# Altium PCB IncubatorPCB.PcbDoc
Units mm, origin at the board's own origin, x right, y up, seen from the top; angles counter-clockwise.
Board outline 90 x 70 mm, 2 copper layers (Top Layer, Bottom Layer); 36 components, 30 nets, 133 pads, 0 vias.
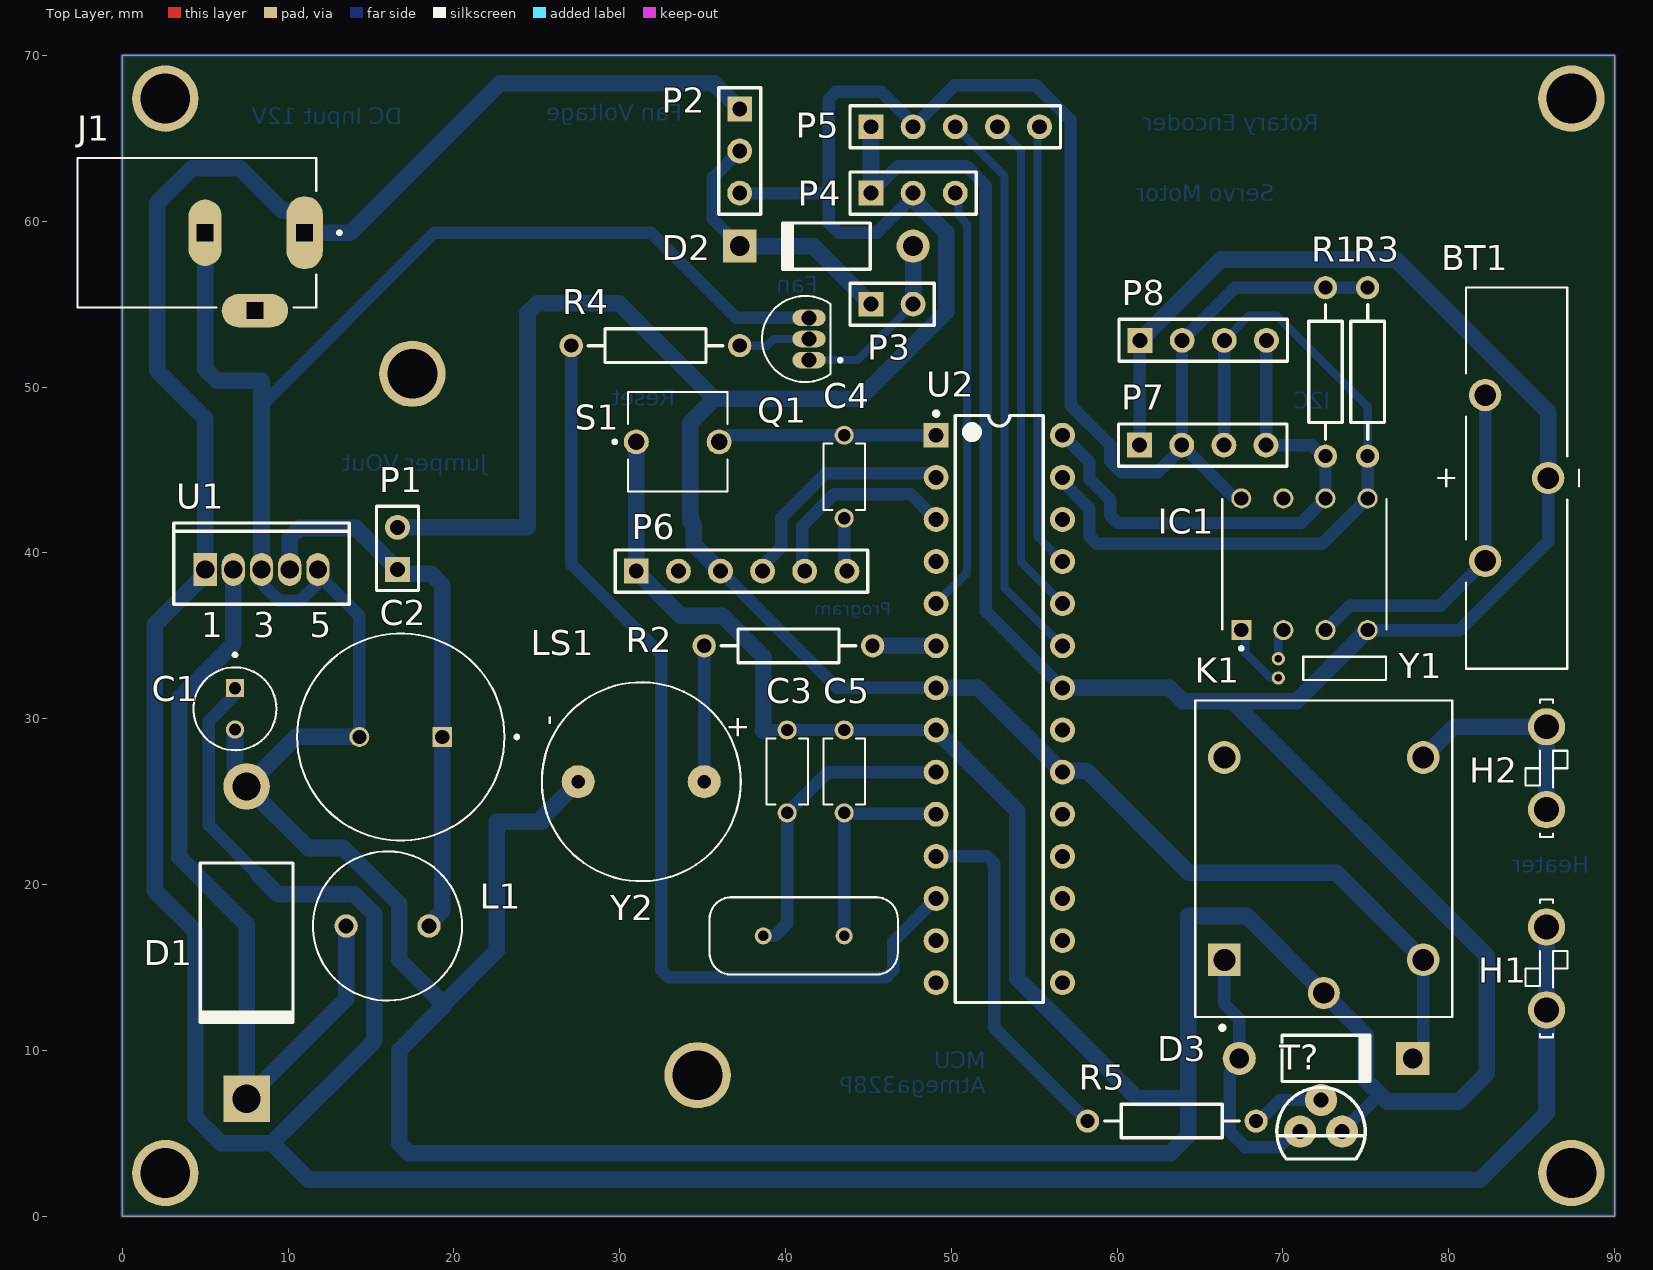
[diagram p0: Top Layer view]
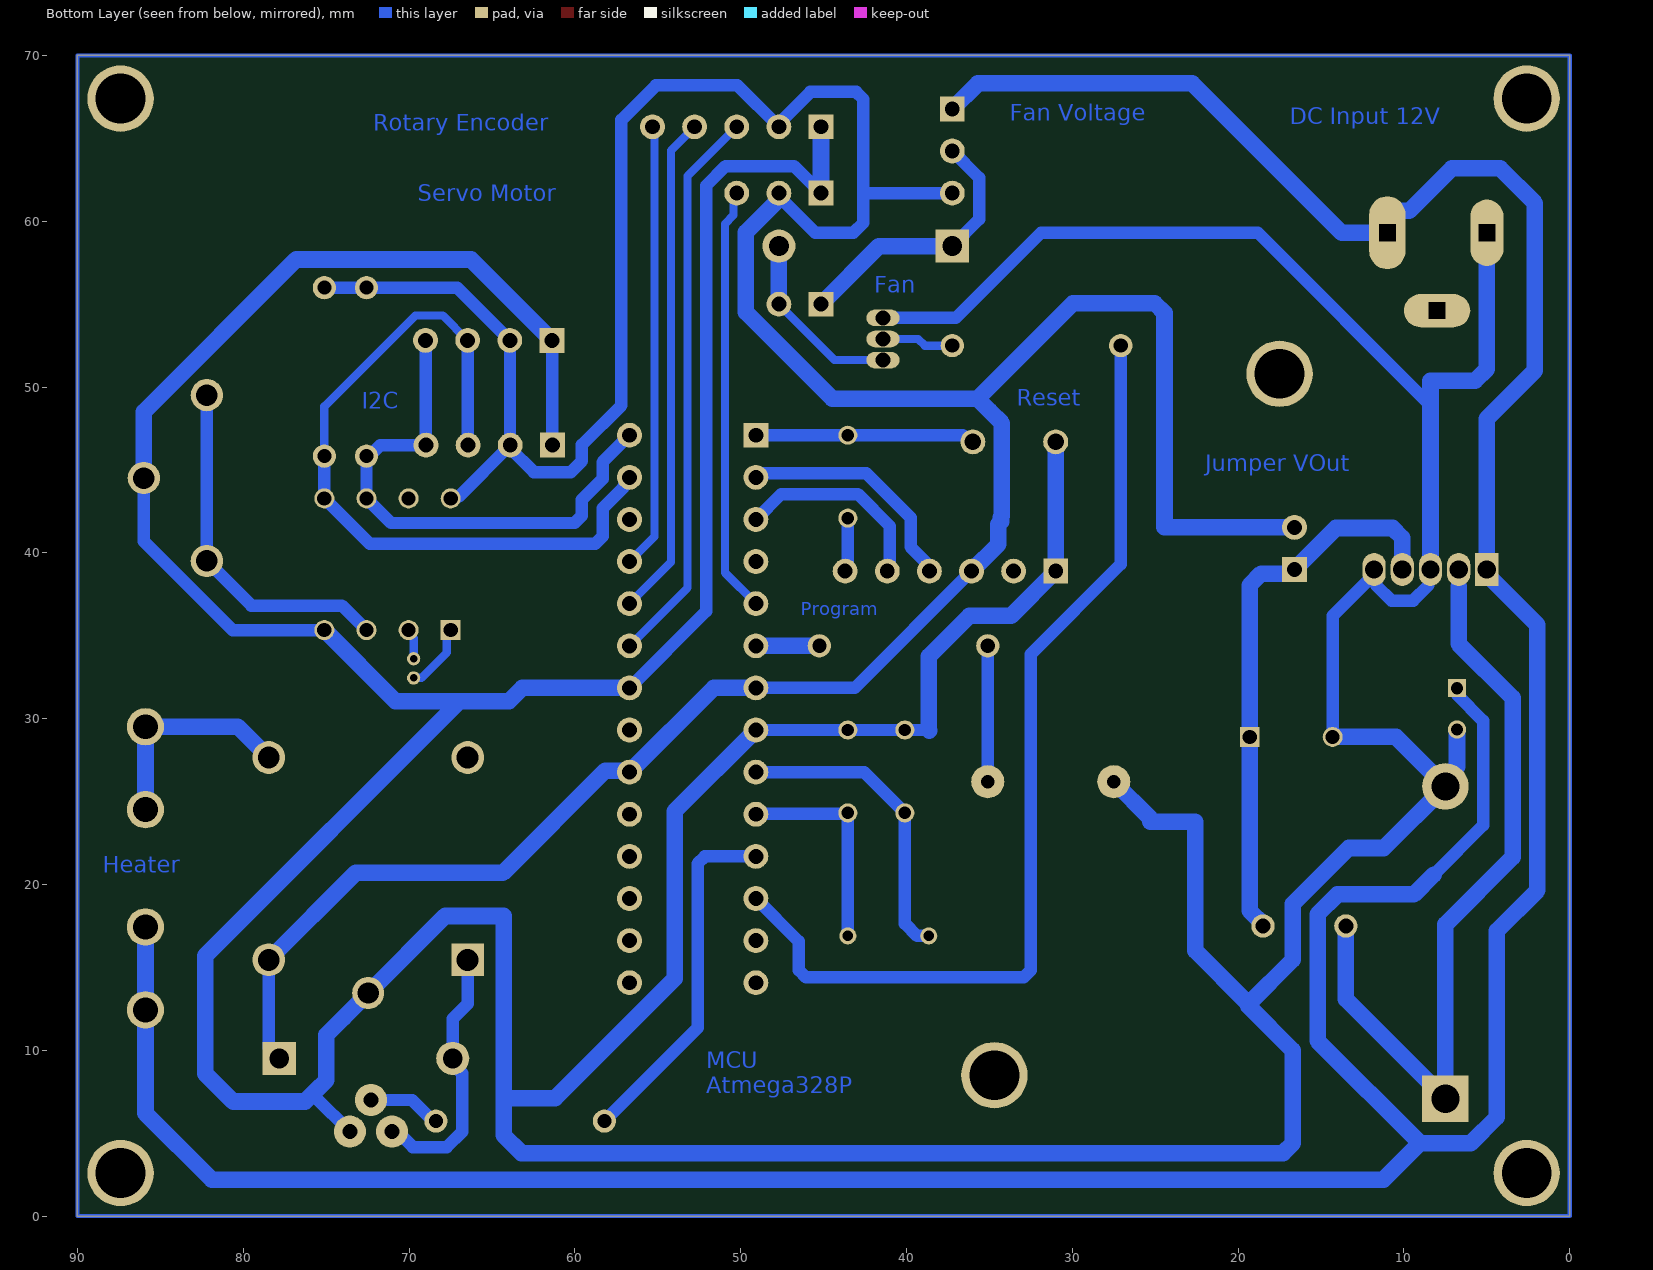
[diagram p1: Bottom Layer view, seen from below]

## Layer stack, top to bottom
Top Solder: solder mask 0.0102, Solder Resist, Dk 3.5
Top Layer: signal copper (thickness not stored)
Dielectric 1: dielectric 0.32, FR-4, Dk 4.8
Bottom Layer: signal copper (thickness not stored)
Bottom Solder: solder mask 0.0102, Solder Resist, Dk 3.5

## Board outline
0,0 0,70 90,70 90,0

## Design rules (kind name [scope] priority, off if disabled: settings)
Clearance [All] p1: gap=0.5 ignorepadtopadclearanceinfootprint=FALSE
PolygonConnect [All] p1: connectstyle=Relief reliefconductorwidth=0.254 reliefentries=4 polygonreliefangle="90 Angle" airgapwidth=0.254
RoutingLayers [All] p1: top layer_v5=FALSE bottom layer_v5=TRUE
RoutingVias [All] p1: holewidth=0.711 width=1.27 viastyle="Through Hole" minholewidth=0.711 minwidth=1.27 maxholewidth=0.711 maxwidth=1.27
SolderMaskExpansion [All] p1: expansion=0.102 istentingtop=FALSE
Width [All] p1: maxlimit=1 minlimit=0.5 preferedwidth=0.75
29 further rules are at their usual default settings.

## Components (designator, comment, footprint, x,y, rotation, side; value= is the part's Value field where it differs from the comment)
BT1 "battery holder 3V" BAT_1074 84.1,44.515 r90 top
C1 "Capacitor 100uF 16V" CAPPRD250W50D500H1100 6.8,30.6 r270 top
C2 "Capacitor 1000uF 25V" CAPPRD500W60D1250H2500 16.8,28.9 r180 top
C3 "Ceramic Capacitor 22pF" CAP_RDE5C2A220J0M1H03A 40.1,26.818 r90 top
C4 "Ceramic Capacitor 0.1uF" CAP_RDE5C2A220J0M1H03A 43.54,44.598 r270 top
C5 "Ceramic Capacitor 22pF" CAP_RDE5C2A220J0M1H03A 43.54,26.818 r90 top
D1 "Diode 1N5822" DO-201AD 7.5,16.5 r270 top
D2 "Diode 1N4007" DO-41 42.47,58.5 r180 top
D3 "Diode 1N4007" DO-41 72.6,9.515 r0 top
H1 "Connector heating wire" TERMINAL_PCRS-250 85.9,14.938 r90 top
H2 "Connector heating wire" TERMINAL_PCRS-250 85.9,27.015 r90 top
IC1 "DS1307" DIP794W47P254L991H457Q8 71.3,39.315 r90 top
J1 "DC Jack" XKB_DC-005-5A-2.0 5,59.309 r0 top
K1 "Relay 5VDC" RELAY_SRD-05VDC-SL-C 72.466,21.559 r90 top
L1 "Inductor 100uH" IND_RLB9012-101KL 16,17.5 r0 top
LS1 "Buzzer 5VDC" CUI_CMI-1295IC-0585T 31.3,26.2 r270 top
P1 "Header Jumper VOut" HDR1X2 16.6,39 r90 top
P2 "HeaderFanVoltage" HDR1X3 37.24,66.78 r270 top
P3 "Header Fan" HDR1X2 45.16,55 r0 top
P4 "Header Servo" HDR1X3 45.16,61.7 r0 top
P5 "Header Rotary Encoder" HDR1X5 45.16,65.7 r0 top
P6 "Header Programmer" HDR1X6 31,38.9 r0 top
P7 "Header I2C (Sensor)" HDR1X4 61.36,46.5 r0 top
P8 "Header I2C (LCD)" HDR1X4 61.386,52.82 r0 top
Q1 "Transistor 2N5551" TO92127P520H787-3 40.4,52.9 r90 top
R1 "Res2" AXIAL-0.4 72.57,50.915 r270 top value=2.2K
R2 "Jumper" AXIAL-0.4 40.18,34.398 r180 top value=0
R3 "Res2" AXIAL-0.4 75.11,50.915 r270 top value=2.2K
R4 "Res2" AXIAL-0.4 32.16,52.5 r0 top value=1K
R5 "Res2" AXIAL-0.4 63.3,5.735 r180 top value=1K
S1 "Switch Reset" SW_BUTT-2 33.5,46.698 r0 top
T? "BC547" TO92 72.3,5.1 r0 top
U1 "LM2576T-5" 314D-03 8.4,39 r0 top
U2 "ATmega328P-PU" 28P3 52.895,30.588 r0 top
Y1 "Crystall 32.768KHZ" XTAL_AB15T-32.768KHZ 69.727,33.037 r180 top
Y2 "Crystall 16MHZ" XTAL_ECS-160-20-4X 41.1,16.9 r0 top

## Footprints (in the part's own frame and the unit in brackets; to place one, negate y for a bottom-side part, rotate by r counter-clockwise, add the part's x,y. Pads: shape width x height; smd on the part's side, far side on the other; paste and mask are expansions set on the pad)
28P3 [mm] "28-Pin Plastic Dual In-Line Package (PDIP)"
  rect 1.5x1.5 hole 0.9: 1(-3.81,16.51)
  round 1.5 hole 0.9: 2(-3.81,13.97) 3(-3.81,11.43) 4(-3.81,8.89) 5(-3.81,6.35) 6(-3.81,3.81) 7(-3.81,1.27) 8(-3.81,-1.27) 9(-3.81,-3.81) 10(-3.81,-6.35) 11(-3.81,-8.89) 12(-3.81,-11.43) 13(-3.81,-13.97) 14(-3.81,-16.51) 15(3.81,-16.51) 16(3.81,-13.97) 17(3.81,-11.43) 18(3.81,-8.89) 19(3.81,-6.35) 20(3.81,-3.81) 21(3.81,-1.27) 22(3.81,1.27) 23(3.81,3.81) 24(3.81,6.35) 25(3.81,8.89) 26(3.81,11.43) 27(3.81,13.97) 28(3.81,16.51)
  silkscreen extent -3.93,-17.7 2.65,17.93, body extent -3.6,-17.65 3.6,17.65, height 4.58
314D-03 [mm] "TO, Thru-Hole, Vertical, Heatsink Mounted; 5 In-Line Leads; Pitch 1.70 mm"
  rect 1.4x2 hole 1.1: 1(-3.4,0)
  oval 1.4x2 hole 1.1: 2(-1.7,0) 3(0,0) 4(1.7,0) 5(3.4,0)
  silkscreen extent -5.3,-2.1 5.3,2.8
AXIAL-0.4 [mm] "Axial Device, Thru-Hole; 2 Leads; 0.4 in Pin Spacing"
  round 1.4 hole 0.85: 1(-5.08,0) 2(5.08,0)
  silkscreen extent -4.06,-1.02 4.06,1.02
BAT_1074 [mm]
  round 1.95 hole 1.3: N(0,-1.9) P_1(-5,1.9) P_2(5,1.9)
  silkscreen extent -11.5,-3.75 11.5,4.75
CAP_RDE5C2A220J0M1H03A [mm]
  round 1.15 hole 0.75: 1(-2.5,0) 2(2.5,0)
  silkscreen extent -2,-1.25 2,1.25
CAPPRD250W50D500H1100 [mm]
  round 1.1 hole 0.75: N(1.25,0)
  rect 1.1x1.1 hole 0.75: P(-1.25,0)
  silkscreen extent -3.35,-2.5 2.5,2.5, body extent -2.5,-2.5 2.5,2.5, height 11
CAPPRD500W60D1250H2500 [mm]
  round 1.2 hole 0.85: N(2.5,0)
  rect 1.2x1.2 hole 0.85: P(-2.5,0)
  silkscreen extent -7.1,-6.25 6.25,6.25, body extent -6.25,-6.25 6.25,6.25, height 25
CUI_CMI-1295IC-0585T [mm]
  round 2 hole 0.8: N(0,-3.8) P(0,3.8)
  silkscreen extent -6,-6 6,6
DIP794W47P254L991H457Q8 [mm]
  rect 1.21x1.21 / inner round 1.21 / far side rect 1.21x1.21 hole 0.86: 1(-3.97,3.81)
  round 1.21 hole 0.86: 2(-3.97,1.27) 3(-3.97,-1.27) 4(-3.97,-3.81) 5(3.97,-3.81) 6(3.97,-1.27) 7(3.97,1.27) 8(3.97,3.81)
  silkscreen extent -5.17,-4.95 3.93,4.95, body extent -4.69,-3.95 4.69,3.95, height 4.57
DO-41 [mm] "Diode, Axial; Body 5.2 x 2.7 mm (LxDia. max), Lead Dia. 0.86 mm (max)"
  round 2 hole 1.2: 1(-5.23,0)
  rect 2x2 hole 1.2: 2(5.23,0)
  silkscreen extent -2.65,-1.4 2.75,1.4
DO-201AD [mm] "Diode, Axial; Body 9.5 x 5.6 mm (LxDia. max), Lead Dia. 1.32 mm (max)"
  round 2.8 hole 1.7: 1(-9.42,0)
  rect 2.8x2.8 hole 1.7: 2(9.42,0)
  silkscreen extent -4.8,-2.8 4.9,2.8
HDR1X2 [mm] "Connector; Header; 2 Position"
  rect 1.5x1.5 hole 0.9: 1(0,0)
  round 1.5 hole 0.9: 2(2.54,0)
  silkscreen extent -1.27,-1.27 3.81,1.27
HDR1X3 [mm] "Connector; Header; 3 Position"
  rect 1.5x1.5 hole 0.9: 1(0,0)
  round 1.5 hole 0.9: 2(2.54,0) 3(5.08,0)
  silkscreen extent -1.27,-1.27 6.35,1.27
HDR1X4 [mm] "Connector; Header; 4 Position"
  rect 1.5x1.5 hole 0.9: 1(0,0)
  round 1.5 hole 0.9: 2(2.54,0) 3(5.08,0) 4(7.62,0)
  silkscreen extent -1.27,-1.27 8.89,1.27
HDR1X5 [mm] "Connector; Header; 5 Position"
  rect 1.5x1.5 hole 0.9: 1(0,0)
  round 1.5 hole 0.9: 2(2.54,0) 3(5.08,0) 4(7.62,0) 5(10.16,0)
  silkscreen extent -1.27,-1.27 11.43,1.27
HDR1X6 [mm] "Connector; Header; 6 Position"
  rect 1.5x1.5 hole 0.9: 1(0,0)
  round 1.5 hole 0.9: 2(2.54,0) 3(5.08,0) 4(7.62,0) 5(10.16,0) 6(12.7,0)
  silkscreen extent -1.27,-1.27 13.97,1.27
IND_RLB9012-101KL [mm]
  round 1.408 hole 0.9: 1(-2.5,0) 2(2.5,0)
  silkscreen extent -4.5,-4.5 4.5,4.5, body extent -4.5,-4.5 4.5,4.5, height 12.2
RELAY_SRD-05VDC-SL-C [mm]
  rect 1.98x1.98 / inner round 1.98 / far side rect 1.98x1.98 hole 1.32: A1(-6.1,6)
  round 1.98 hole 1.32: A2(-6.1,-6) NC(6.1,6) NO(6.1,-6)
  round 1.935 hole 1.29: COM(-8.1,0)
  silkscreen extent -10.3,-7.75 9.55,7.75, body extent -9.6,-7.8 9.6,7.8, height 15.8
SW_BUTT-2 [mm]
  round 1.508 hole 1: 1(-2.5,0) 2(2.5,0)
  silkscreen extent -3.9,-3 3,3
TERMINAL_PCRS-250 [mm]
  round 2.25 hole 1.5: 1(-2.5,0) 2(2.5,0)
  silkscreen extent -4.15,-1.27 4.15,1.27
TO92 [mil]
  round 76 hole 35.43: 1(50,0) 2(0,75) 3(-50,0)
  silkscreen extent -105,-65 105,105, body extent -94,-60 94,94, height 315
TO92127P520H787-3 [mm]
  oval 1x2 hole 0.9: 1(-1.27,-1.02) 2(0,-1.02) 3(1.27,-1.02)
  silkscreen extent -2.6,-3 2.6,1.81, body extent -2.4,-1.53 2.4,2.4, height 7.74
XKB_DC-005-5A-2.0 [mm]
  oval 2.2x4.4 hole 1 square: 1(6,0)
  oval 2x4 hole 1 square: 2(0,0)
  oval 4x2 hole 1 square: 3(3,-4.7)
  silkscreen extent -7.7,-4.5 8.2,4.5
XTAL_AB15T-32.768KHZ [mm]
  round 0.8 hole 0.45: 1(0,0.58) 2(0,-0.58)
  silkscreen extent -6.5,-0.7 -1.5,0.7
XTAL_ECS-160-20-4X [mm]
  round 1.03 hole 0.63: 1(-2.44,0) 2(2.44,0)
  silkscreen extent -5.68,-2.33 5.68,2.33

## Part data
BT1: library part 1074, Package=None, Availability=Unavailable, MP=1074, Price=None
C1: library part EEUHD1C101, "CAP ALUM 100UF 20% 16V RADIAL", Package="RADIAL-2 Panasonic", Availability="In Stock", Check_prices=https://www.snapeda.com/parts/EEUHD1C101/Panasonic/view-part/5791153/?ref=eda, MF=Panasonic, MP=EEUHD1C101, Price=None, SnapEDA_Link=https://www.snapeda.com/parts/EEUHD1C101/Panasonic/view-part/5791153/?ref=snap
C2: library part EEUTA1E102LB, "CAP ALUM 1000UF 20% 25V RADIAL", Package="RADIAL-2 Panasonic", Availability="No availability data", Check_prices=https://www.snapeda.com/parts/EEUTA1E102LB/Panasonic/view-part/5789306/?ref=eda, MF=Panasonic, MP=EEUTA1E102LB, Price=None, SnapEDA_Link=https://www.snapeda.com/parts/EEUTA1E102LB/Panasonic/view-part/5789306/?ref=snap
C3 C4 C5: library part RDE5C2A220J0M1H03A, "Lead Capacitor C0G_EIA_ with Capacitance: 22pF and Rated Voltage: 100Vdc", Package="Radial Murata", Availability=Unavailable, MF=Murata, MP=RDE5C2A220J0M1H03A, Price=None, SnapEDA_Link=https://www.snapeda.com/parts/RDE5C2A220J0M1H03A/Murata/view-part/4545539/?ref=snap
D1: library part "Diode 1N5408", "3 Amp Medium Power Silicon Rectifier Diode", ComponentLink1Description="Manufacturer Link", ComponentLink1URL=http://www.irf.com/, DatasheetVersion=Aug-1984, LatestRevisionDate=17-Jul-2002, LatestRevisionNote="Re-released for DXP Platform.", PackageDescription="Diode, Axial; Body 9.5 x 5.3 mm (LxDia. max), Lead Dia. 1.32 mm (max)", PackageReference=DO-201AD, Published=8-Jun-2000, Publisher="Altium Limited"
D2 D3: "1 Amp General Purpose Rectifier", Code_JEDEC=DO-204-AL, ComponentLink1Description="Manufacturer Link", ComponentLink1URL=http://www.fairchildsemi.com/, ComponentLink2Description=Datasheet, ComponentLink2URL=http://www.fairchildsemi.com/ds/1N%2F1N4001.pdf, DatasheetVersion=1998, LatestRevisionDate=17-Jul-2002, LatestRevisionNote="Re-released for DXP Platform.", PackageDescription="Diode, Axial; Body 5.2 x 2.7 mm (LxDia. max), Lead Dia. 0.86 mm (max)", PackageReference=DO-41, PackageVersion=Aug-1999, Published=8-Jun-2000, Publisher="Altium Limited"
H1 H2: library part PCRS-250, "PCRS250- Valcon PCB Mount Spade Terminal, 10.5mm PCB Profile", Package=None, Availability=Unavailable, MP=PCRS-250, Price=None
IC1: "Real Time Clock (RTC) IC Clock/Calendar 56B IÂ²C, 2-Wire Serial 8-SOIC (0.154, 3.90mm Width)", Package="DIP-8 Maxim Integrated", Availability="In Stock", Check_prices=https://www.snapeda.com/parts/DS1307/Maxim+Integrated/view-part/?ref=eda, MF="Maxim Integrated", MP=DS1307, Price=None, Purchase-URL=https://pricing.snapeda.com/search/part/DS1307/?ref=eda, SnapEDA_Link=https://www.snapeda.com/parts/DS1307/Maxim+Integrated/view-part/?ref=snap
J1: library part DC-005-5A-2.0, "DC Power Receptacle Jack, Through Holeï¼ŒRight Angle", Package=Package, Check_prices=https://www.snapeda.com/parts/DC-005-5A-2.0/XKB+Industrial+Precision/view-part/?ref=eda, MF="XKB Industrial Precision", MP=DC-005-5A-2.0, SnapEDA_Link=https://www.snapeda.com/parts/DC-005-5A-2.0/XKB+Industrial+Precision/view-part/?ref=snap
K1: library part SRD-05VDC-SL-C, "5V Trigger Relay Module For Arduino And Raspberry Pi 5V Trigger Relay Module For Arduino And Raspberry Pi", Package="NON STANDARD-5 Songle Relay", Availability="Not in stock", Check_prices=https://www.snapeda.com/parts/SRD-05VDC-SL-C/Songle+Relay/view-part/?ref=eda, MF="Songle Relay", MP=SRD-05VDC-SL-C, Price=None, SnapEDA_Link=https://www.snapeda.com/parts/SRD-05VDC-SL-C/Songle+Relay/view-part/?ref=snap
L1: library part RLB9012-101KL, Package=None, Availability=Unavailable, MP=RLB9012-101KL, Price=None
LS1: library part CMI-1295IC-0585T, "12 mm, 5 Vdc, 85 dB, Through Hole, Driving Circuit, Magnetic Audio Indicator Buzzer", Package=Package, Availability="In Stock", Check_prices=https://www.snapeda.com/parts/CMI-1295IC-0585T/CUI+Devices/view-part/?ref=eda, CUI_purchase_URL=https://www.cuidevices.com/product/audio/buzzers/audio-indicators/cmi-1295ic-0585t?utm_source=snapeda.com&utm_medium=referral&utm_campaign=snapedaBOM, MF="CUI Devices", MP=CMI-1295IC-0585T, Price=None, Purchase-URL=https://pricing.snapeda.com/search/part/CMI-1295IC-0585T/?ref=eda, SnapEDA_Link=https://www.snapeda.com/parts/CMI-1295IC-0585T/CUI+Devices/view-part/?ref=snap
P1 P3: library part "Header 2", "Header, 2-Pin", LatestRevisionDate=17-Jul-2002, LatestRevisionNote="Re-released for DXP Platform.", Publisher="Altium Limited"
P2 P4: library part "Header 3", "Header, 3-Pin", LatestRevisionDate=17-Jul-2002, LatestRevisionNote="Re-released for DXP Platform.", Publisher="Altium Limited"
P5: library part "Header 5", "Header, 5-Pin", LatestRevisionDate=17-Jul-2002, LatestRevisionNote="Re-released for DXP Platform.", Publisher="Altium Limited"
P6: library part "Header 6", "Header, 6-Pin", LatestRevisionDate=17-Jul-2002, LatestRevisionNote="Re-released for DXP Platform.", Publisher="Altium Limited"
P7 P8: library part "Header 4", "Header, 4-Pin", LatestRevisionDate=17-Jul-2002, LatestRevisionNote="Re-released for DXP Platform.", Publisher="Altium Limited"
Q1: library part 2N5551, "Bipolar (BJT) Transistor NPN 160 V 600 mA 300MHz 625 mW Through Hole TO-92 (TO-226)", Package="E-PKG AXIAL-LEADED-2 ON Semiconductor", Availability="Not in stock", Check_prices=https://www.snapeda.com/parts/2N5551/Onsemi/view-part/?ref=eda, MF="ON Semiconductor", MP=2N5551, Price=None, SnapEDA_Link=https://www.snapeda.com/parts/2N5551/Onsemi/view-part/?ref=snap
R1 R3 R4 R5: "Resistor", LatestRevisionDate=17-Jul-2002, LatestRevisionNote="Re-released for DXP Platform.", PackageDescription="Axial Device, Thru-Hole; 2 Leads; 0.4 in Pin Spacing", PackageReference=AXIAL-0.4, Published=8-Jun-2000, Publisher="Altium Limited"
R2: library part Res2, "Resistor", LatestRevisionDate=17-Jul-2002, LatestRevisionNote="Re-released for DXP Platform.", PackageDescription="Axial Device, Thru-Hole; 2 Leads; 0.4 in Pin Spacing", PackageReference=AXIAL-0.4, Published=8-Jun-2000, Publisher="Altium Limited"
S1: library part BUTT-2, "Tactile Switches MINI PUSH BUTTON SWITCH 2-PIN QTY. 4", Package=None, Availability="In Stock", Check_prices=https://www.snapeda.com/parts/BUTT-2/Gravitech/view-part/?ref=eda, MF=Gravitech, MP=BUTT-2, Price=None, Purchase-URL=https://pricing.snapeda.com/search/part/BUTT-2/?ref=eda, SnapEDA_Link=https://www.snapeda.com/parts/BUTT-2/Gravitech/view-part/?ref=snap
T?: "Bipolar (BJT) Transistor NPN 45V 100mA 300MHz 625mW Through Hole TO-92 (TO-226)", Package="E-PKG AXIAL-LEADED-2 ON Semiconductor", Availability="In Stock", Check_prices=https://www.snapeda.com/parts/BC547/Onsemi/view-part/?ref=eda, MF=ON, MP=BC547, Price=None, Purchase-URL=https://pricing.snapeda.com/search/part/BC547/?ref=eda, SnapEDA_Link=https://www.snapeda.com/parts/BC547/Onsemi/view-part/?ref=snap
U1: "Easy Switcher 3.0A Step-Down Voltage Regulator", Code_JEDEC=TS-001-AA, ComponentLink1Description="Manufacturer Link", ComponentLink1URL=http://www.onsemi.com/site/products/taxonomy/0,4438,503,00.html, ComponentLink2Description=Datasheet, ComponentLink2URL=http://www.onsemi.com/pub/Collateral/LM2576-D.PDF, DatasheetVersion=Jul-1999, PackageDescription="TO, Thru-Hole, Vertical, Heatsink Mounted; 5 In-Line Leads; Pitch 1.70 mm", PackageReference=314D-03, PackageVersion=Jul-1999, Published=15-Apr-2002, Publisher="Altium Limited"
U2: "8-bit AVR Microcontroller, 32KB Flash, 1KB EEPROM, 2KB SRAM, 28-pin PDIP, Industrial Grade (-40°C to 85°C)", ComponentLink1Description="Manufacturer URL", ComponentLink1URL=http://www.atmel.com/, ComponentLink2Description="ATmega48A/48PA/88A/88PA/168A/168PA/328/328P Datasheet", ComponentLink2URL=http://www.atmel.com/dyn/resources/prod_documents/8271.pdf, ComponentLink3Description="ATmega48A/48PA/88A/88PA/168A/168PA/328/328P Summary", ComponentLink3URL=http://www.atmel.com/dyn/resources/prod_documents/8271S.pdf, DatasheetVersion="revD, May-2011", PackageDescription="28-lead (0.300\"/7.62mm Wide) Plastic Dual Inline Package (PDIP)", PackageReference=28P3, PackageVersion="revB, Sep-2001"
Y1: library part AB15T-32.768KHZ, Package=None, Availability=Unavailable, MP=AB15T-32.768KHZ, Price=None
Y2: library part ECS-160-S-4, "16MHz Â±30ppm Crystal Series 40 Ohms HC-49/US", Package="HC49/US ECS International", Availability=Unavailable, MF="ECS Inc.", MP=ECS-160-S-4, Price=None, SnapEDA_Link=https://www.snapeda.com/parts/ECS-160-S-4/ECS%20Inc./view-part/3657575/?ref=snap

## Free pads (board coordinates)
  round 4 hole 3: PTH1(2.6,2.6) PTH1(2.6,67.4) PTH1(17.5,50.8) PTH1(34.7,8.5) PTH1(87.4,2.6) PTH1(87.4,67.4)

## Nets (pads, with @x,y where several pads share a name; then routed paths per layer and width w, separated by ;. In a path a pad name is that pad's centre, name@x,y a point inside that pad or via, vN(x,y) a via of type N, cw(c..) or ccw(c..) an arc to the next point about the centre after c; other vN are vias at no path point)
+5: D3.2 IC1.8 K1.A2 P1.2 P2.3 P4.2 P5.2 P6.3 P7.2 P8.2 R1.1 R3.1 U2.7 U2.20 | length 216.6
  Bottom Layer w0.75: P6.3 43.122,31.858 U2.7 ; P2.3 42.6,61.7 ; P4.2 47.7,61.503 45.511,59.313 43.199,59.313 42.6,59.912 42.6,61.7 ; IC1.8 67.402,43.373 67.027,43.373 P7.2 ; R3.1 R1.1 67.101,55.995 P8.2 63.913,52.807 63.913,46.513 P7.2 ; D3.2 78.455,10.14 78.455,10.569 78.466,10.58 K1.A2 ; 42.6,61.7 42.6,67.361 43.039,67.8 45.797,67.8 47.7,65.897 P5.2 50.2,68.2 55.118,68.2 57.2,66.118 57.2,48.901 59.58,46.521 59.58,45.543 60.248,44.875 62.472,44.875 63.9,46.303 P7.2
  Bottom Layer w1: P1.2 24.44,41.54 24.44,54.474 25.026,55.06 29.961,55.06 35.721,49.3 ; P6.3 34.457,40.523 34.457,41.723 34.303,41.877 34.303,42.159 34.246,42.217 34.246,47.825 34.984,48.562 35.721,49.3 ; P4.2 47.796,61.604 47.796,61.233 49.7,59.328 49.7,54.525 44.475,49.3 35.721,49.3 ; U2.7 51.625,31.858 U2.20 56.801,26.874 58.168,26.874 64.342,20.7 73.225,20.7 K1.A2
+12: C1.P H1.1 H1.2 J1.1 P2.1 U1.1 | length 234.1
  Bottom Layer w0.75: C1.P@6.8,31.45 5.225,29.875 5.225,23.575 8.2,20.6
  Bottom Layer w1: 8.2,20.6 9.397,19.403 14.007,19.403 15.204,18.206 15.204,10.57 9.034,4.4 ; P2.1 35.7,68.32 22.767,68.32 13.755,59.309 J1.1 11,60.084 10.446,60.639 9.67,60.639 7.109,63.2 4.2,63.2 2.1,61.1 2.1,51 5,48.1 5,38.7 1.95,35.65 1.95,19.65 4.4,17.2 4.4,5.966 5.966,4.4 9.034,4.4 ; H1.2 H1.1 85.9,6.2 81.9,2.2 11.234,2.2 9.034,4.4
BuzzerPin(D4): R2.1 U2.6 | length 3.8
  Bottom Layer w1: R2.1 U2.6
FanPin(D6): R4.1 U2.12 | length 59.7
  Bottom Layer w0.75: R4.1 27.08,39.32 32.5,33.9 32.5,14.839 32.939,14.4 46.061,14.4 46.5,14.839 46.5,16.573 U2.12
GND: BT1.N C1.N C2.N C3.2 C5.2 D1.1 IC1.4 J1.2 K1.COM LS1.N P4.1 P5.1 P6.1 P7.1 P8.1 Q1.3 S1.1 T?.1 U1.3 U1.5 U2.8 U2.22 | length 443.7
  Bottom Layer w0.75: 8.4,48.9 18.809,59.309 31.891,59.309 37.03,54.17 Q1.3 ; U1.3@8.524,38.048 9.448,37.125 10.752,37.125 11.676,38.048 11.676,38.876 U1.5 11.8,38.7 14.3,36.2 C2.N ; 38.66,29.318 C3.2 C5.2 U2.8 ; P4.1 46.785,63.325 50.913,63.325 52.08,62.158 52.08,36.483 U2.22 ; P7.1 61.373,46.513 61.373,52.807 P8.1 ; K1.COM 72.466,13.268 73.85,11.884 ; T?.1 75.635,7.165 75.635,7.55 ; IC1.4 80.646,35.345 86,40.699 BT1.N
  Bottom Layer w1: J1.2 5,51.086 5.705,50.381 8.4,50.381 8.4,48.9 U1.3 ; C1.N 6.8,27.107 7.5,26.407 D1.1 ; C2.N 10.48,28.9 D1.1 ; LS1.N 25.289,23.989 25.289,23.789 22.589,23.789 22.589,16.011 19.374,12.796 ; S1.1 P6.1 33.695,36.205 36.215,36.205 38.66,33.76 38.66,29.318 38.631,29.289 ; P4.1 P5.1 ; U2.8 53.975,24.428 53.975,14.333 61.196,7.112 64.3,7.112 ; U2.22 63.173,31.858 63.974,31.057 66.943,31.057 ; P8.1 66.261,57.695 76.813,57.695 86,48.508 BT1.N ; IC1.4 70.821,31.057 66.943,31.057 ; D1.1 11.219,22.201 13.33,22.201 16.704,18.827 16.704,15.466 19.374,12.796 ; 19.374,12.796 19.374,12.671 16.704,10 16.704,4.386 17.29,3.8 63.221,3.8 64.3,4.879 64.3,7.112 ; 64.3,7.112 64.3,18.1 67.825,18.1 K1.COM 75,10.925 75,8.186 75.635,7.55 76.271,6.915 80.615,6.915 82.3,8.6 82.3,15.7 66.943,31.057
HeaterPin(D5): R5.2 U2.11 | length 21.5
  Bottom Layer w0.75: U2.11 52.161,21.698 52.6,21.259 52.6,11.355 R5.2
NetBT1_P_1: BT1.P_1 BT1.P_2 IC1.3 | length 21.4
  Bottom Layer w0.75: IC1.3 74.05,36.825 79.51,36.825 BT1.P_1 BT1.P_2
NetC2_P: C2.P L1.2 P1.1 U1.4 | length 33.7
  Bottom Layer w1: U1.4 10.1,40.914 10.686,41.5 14.1,41.5 P1.1 16.85,38.75 18.61,38.75 19.3,38.06 C2.P 19.3,18.41 18.5,17.61 L1.2
NetC3_1: C3.1 U2.9 Y2.1 | length 18.4
  Bottom Layer w0.75: Y2.1 39.361,16.9 40.1,17.639 C3.1 42.56,26.778 U2.9
NetC4_2: C4.2 P6.6 | length 3.1
  Bottom Layer w0.75: P6.6@43.54,39 C4.2
NetC5_1: C5.1 U2.10 Y2.2 | length 13
  Bottom Layer w0.75: Y2.2 C5.1 43.58,24.278 49.045,24.278 U2.10
NetD1_2: D1.2 L1.1 U1.2 | length 46.8
  Bottom Layer w1: 6.7,38 6.7,34.514 3.45,31.264 3.45,21.647 7.5,17.597 D1.2 13.5,13.08 L1.1
NetD2_1: D2.1 P3.2 Q1.1 | length 11.2
  Bottom Layer w0.5: Q1.1 44.351,51.63 47.7,54.979 P3.2
  Bottom Layer w1: P3.2 D2.1
NetD2_2: D2.2 P2.2 P3.1 | length 16.5
  Bottom Layer w0.75: D2.2 35.615,60.125 35.615,62.615 P2.2
  Bottom Layer w1: D2.2 41.66,58.5 P3.1
NetD3_1: D3.1 K1.A1 T?.3 | length 16.2
  Bottom Layer w0.75: K1.A1 66.466,12.801 67.37,11.897 D3.1 67.37,9.177 66.805,8.612 66.805,5.083 67.728,4.16 69.771,4.16 70.711,5.1 T?.3 T?.3@71.03,5.313
NetH2_1: H2.1 H2.2 K1.NO | length 13.2
  Bottom Layer w1: K1.NO 80.322,29.515 H2.2 H2.1
NetIC1_1: IC1.1 Y1.1 | length 4.1
  Bottom Layer w0.5: IC1.1 67.727,35.108 67.727,33.99 69.251,32.467 69.717,32.467 Y1.1
NetIC1_2: IC1.2 Y1.2 | length 1.9
  Bottom Layer w0.5: Y1.2 69.727,34.85 70.03,35.153 IC1.2
NetLS1_P: LS1.P R2.2 | length 8.2
  Bottom Layer w0.75: LS1.P R2.2
NetQ1_2: Q1.2 R4.2 | length 4.6
  Bottom Layer w0.5: R4.2@37.412,52.672 R4.2 38.896,52.5 39.296,52.9 Q1.2
NetR5_1: R5.1 T?.2 | length 4.4
  Bottom Layer w0.75: R5.1 68.551,5.735 69.821,7.005 T?.2
ResetPin: C4.1 S1.2 U2.1 | length 13.3
  Bottom Layer w0.75: S1.2 36.205,46.698 36.605,47.098 C4.1 U2.1
RotaryButton: P5.3 U2.23 | length 34
  Bottom Layer w0.5: P5.3 53.205,62.735 53.205,37.898 U2.23
RotaryCLK: P5.5 U2.25 | length 26.9
  Bottom Layer w0.5: P5.5 55.205,65.585 55.205,40.978 U2.25
RotaryDT: P5.4 U2.24 | length 30.4
  Bottom Layer w0.5: P5.4 54.205,64.275 54.205,39.438 U2.24
RX: P6.4 U2.2 | length 14.2
  Bottom Layer w0.75: P6.4@38.46,39 38.46,39.072 39.75,40.362 39.75,42.126 42.422,44.798 48.642,44.798 48.882,44.558 U2.2
SCL(A5): IC1.6 P7.4 P8.4 R1.2 U2.28 | length 32.6
  Bottom Layer w0.75: U2.28 58.33,45.473 58.33,44.459 59.58,43.209 59.58,42.245 60.019,41.805 66.877,41.805 68.103,41.805 69.417,41.805 71.09,41.805 IC1.6 R1.2 72.394,45.835 71.729,46.5 P7.4 68.993,46.513 68.993,52.807 P8.4
SDA(A4): IC1.5 P7.3 P8.3 R3.2 U2.27 | length 45.7
  Bottom Layer w0.5: P8.3 67.966,54.32 69.627,54.32 75.11,48.838 R3.2
  Bottom Layer w0.75: U2.27 56.705,44.355 57.08,43.98 57.08,43.941 58.33,42.691 58.33,40.995 58.769,40.555 72.38,40.555 IC1.5 R3.2 ; P7.3 66.453,46.513 66.453,52.807 P8.3
ServoPin(D3): P4.3 U2.5 | length 25.8
  Bottom Layer w0.5: U2.5 50.95,38.803 50.95,59.846 50.431,60.365 50.431,61.509 P4.3
TX: P6.5 U2.3 | length 12.1
  Bottom Layer w0.75: P6.5@41,39 41,41.609 42.939,43.548 47.555,43.548 U2.3
pads on no net: IC1.7 J1.3 K1.NC P6.2 U2.4 U2.13 U2.14 U2.15 U2.16 U2.17 U2.18 U2.19 U2.21 U2.26
copper on no net: | length 320
  Bottom Layer w0.254: 0,0 90,0 90,70 0,70 0,0

## Other copper
Bottom Layer:
  text "Fan Voltage" at 33.765,66.067 h1
  text "DC Input 12V" at 16.882,65.867 h1
  text "Rotary Encoder" at 72.165,65.467 h1
  text "Servo Motor" at 69.465,61.2 h1
  text "Fan" at 41.933,55.7 h1
  text "Reset" at 33.345,48.88 h1
  text "I2C" at 72.85,48.7 h1
  text "Jumper VOut" at 21.971,44.928 h1
  text "Program" at 46.366,36.233 h0.8
  text "Heater" at 88.465,20.696 h1
  text "MCU / Atmega328P" at 52.091,7.411 h1

## Text inside footprints (layer, text, board x,y; h text height)
LS1: Top Overlay "-" at 25.31,30.2 h1.27 r270; Top Overlay "+" at 36.57,30.2 h1.27 r270; Mechanical 13 "-" at 25.31,30.2 h1.27 r270; Mechanical 13 "+" at 36.57,30.2 h1.27 r270
T?: Mechanical 13 "2" at 71.665,5.735 h1.42; Mechanical 13 "3" at 70.141,5.1 h1.42; Mechanical 13 "1" at 73.443,5.1 h1.42
U1: Top Overlay "1" at 4.75,34.925 h1.5; Top Overlay "3" at 7.9,34.925 h1.5; Top Overlay "5" at 11.3,34.925 h1.5